# Altium PCB MCU_FOR_DOWNLOAD_V6_8_ROW_PCS.PcbDoc (part 3 of 4)
Units mil, origin at the board's own origin, x right, y up, seen from the top; angles counter-clockwise.
Board outline 2364.06 x 7042.09 mil, 4 copper layers (Top, GND1, GND2, Bottom), stack 35.4 mil thick; 280 components, 38 nets, 1144 pads, 944 vias.
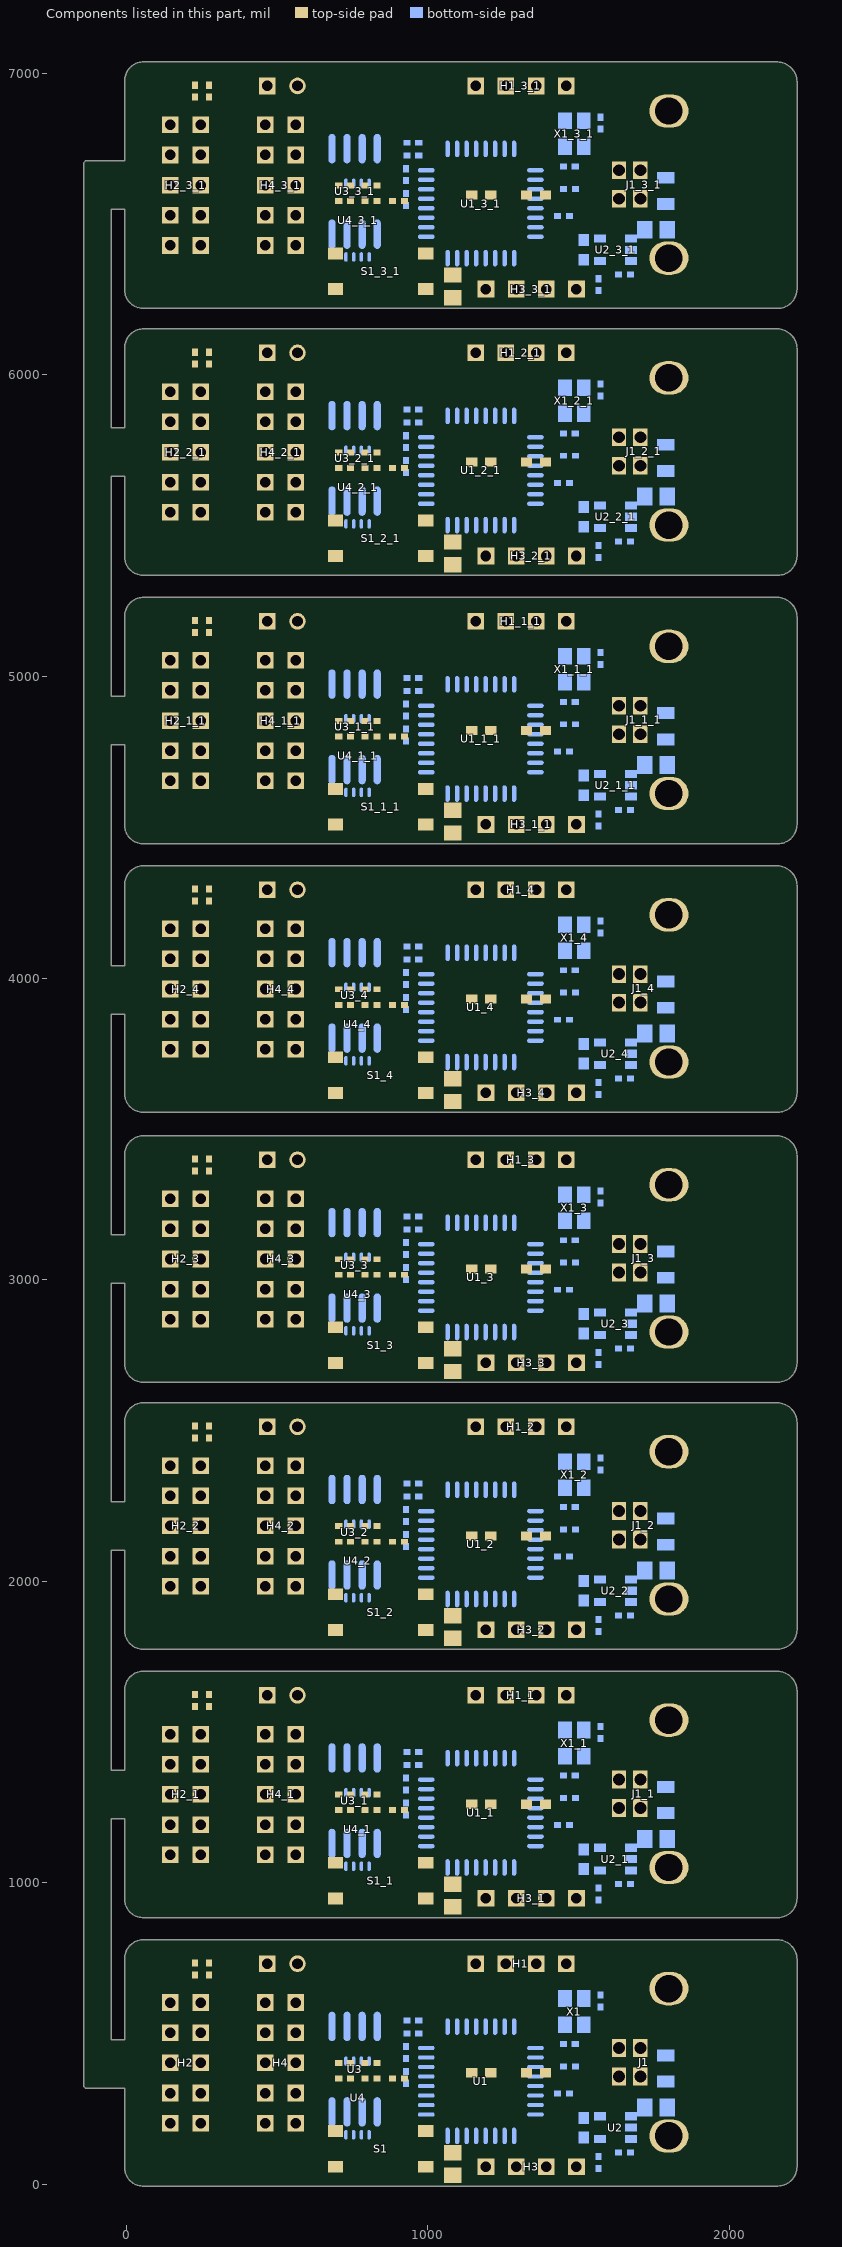
[diagram p3: the components of this part, seen from the top]

## Via types
v1: diameter 16/16/16/16 (per signal layer), hole 8, Top to Bottom, 936 vias
v2: diameter 55/55/55/55 (per signal layer), hole 37, Top to Bottom, 8 vias

## Nets (pads, with @x,y where several pads share a name; then routed paths per layer and width w, separated by ;. In a path a pad name is that pad's centre, name@x,y a point inside that pad or via, vN(x,y) a via of type N, cw(c..) or ccw(c..) an arc to the next point about the centre after c; other vN are vias at no path point) (continued)
copper on no net: (continued)
  Bottom w7.87: 146.85,1393.54 194.88,1441.57 413.78,1441.57 461.81,1393.54 508.27,1440 509.06,1440 509.84,1440.79 582.68,1440.79 601.57,1459.69 601.57,1497.09 637.4,1532.91 878.74,1532.91 966.14,1445.51 966.14,1434.09 966.14,1432.91 968.9,1432.91 970.08,1434.09 970.08,1391.58 970.08,1389.61 928.35,1347.87 ; 146.85,2283.54 194.88,2331.57 413.78,2331.57 461.81,2283.54 508.27,2330 509.06,2330 509.84,2330.79 582.68,2330.79 601.57,2349.69 601.57,2387.09 637.4,2422.91 878.74,2422.91 966.14,2335.51 966.14,2324.09 966.14,2322.91 968.9,2322.91 970.08,2324.09 970.08,2281.58 970.08,2279.61 928.35,2237.87 ; 146.85,3168.54 194.88,3216.57 413.78,3216.57 461.81,3168.54 508.27,3215 509.06,3215 509.84,3215.79 582.68,3215.79 601.57,3234.69 601.57,3272.09 637.4,3307.91 878.74,3307.91 966.14,3220.51 966.14,3209.09 966.14,3207.91 968.9,3207.91 970.08,3209.09 970.08,3166.58 970.08,3164.61 928.35,3122.87 ; 146.85,4063.54 194.88,4111.57 413.78,4111.57 461.81,4063.54 508.27,4110 509.06,4110 509.84,4110.79 582.68,4110.79 601.57,4129.69 601.57,4167.09 637.4,4202.91 878.74,4202.91 966.14,4115.51 966.14,4104.09 966.14,4102.91 968.9,4102.91 970.08,4104.09 970.08,4061.58 970.08,4059.61 928.35,4017.87 ; 146.85,4953.54 194.88,5001.57 413.78,5001.57 461.81,4953.54 508.27,5000 509.06,5000 509.84,5000.79 582.68,5000.79 601.57,5019.69 601.57,5057.09 637.4,5092.91 878.74,5092.91 966.14,5005.51 966.14,4994.09 966.14,4992.91 968.9,4992.91 970.08,4994.09 970.08,4951.58 970.08,4949.61 928.35,4907.87 ; 146.85,5843.54 194.88,5891.57 413.78,5891.57 461.81,5843.54 508.27,5890 509.06,5890 509.84,5890.79 582.68,5890.79 601.57,5909.69 601.57,5947.09 637.4,5982.91 878.74,5982.91 966.14,5895.51 966.14,5884.09 966.14,5882.91 968.9,5882.91 970.08,5884.09 970.08,5841.58 970.08,5839.61 928.35,5797.87 ; 146.85,6728.54 194.88,6776.57 413.78,6776.57 461.81,6728.54 508.27,6775 509.06,6775 509.84,6775.79 582.68,6775.79 601.57,6794.69 601.57,6832.09 637.4,6867.91 878.74,6867.91 966.14,6780.51 966.14,6769.09 966.14,6767.91 968.9,6767.91 970.08,6769.09 970.08,6726.58 970.08,6724.61 928.35,6682.87 ; 461.81,1193.54 511.42,1243.15 511.42,1243.94 598.82,1243.94 638.58,1283.7 638.58,1432.91 638.98,1433.31 638.98,1470.31 661.02,1492.36 753.9,1492.36 785.12,1461.14 785.12,1417.05 782.48,1414.41 782.48,1321.1 v1@782.48,1320.31 ; 461.81,2083.54 511.42,2133.15 511.42,2133.94 598.82,2133.94 638.58,2173.7 638.58,2322.91 638.98,2323.31 638.98,2360.31 661.02,2382.36 753.9,2382.36 785.12,2351.14 785.12,2307.05 782.48,2304.41 782.48,2211.1 v1@782.48,2210.31 ; 461.81,2968.54 511.42,3018.15 511.42,3018.94 598.82,3018.94 638.58,3058.7 638.58,3207.91 638.98,3208.31 638.98,3245.31 661.02,3267.36 753.9,3267.36 785.12,3236.14 785.12,3192.05 782.48,3189.41 782.48,3096.1 v1@782.48,3095.31 ; 461.81,3863.54 511.42,3913.15 511.42,3913.94 598.82,3913.94 638.58,3953.7 638.58,4102.91 638.98,4103.31 638.98,4140.31 661.02,4162.36 753.9,4162.36 785.12,4131.14 785.12,4087.05 782.48,4084.41 782.48,3991.1 v1@782.48,3990.31 ; 461.81,4753.54 511.42,4803.15 511.42,4803.94 598.82,4803.94 638.58,4843.7 638.58,4992.91 638.98,4993.31 638.98,5030.31 661.02,5052.36 753.9,5052.36 785.12,5021.14 785.12,4977.05 782.48,4974.41 782.48,4881.1 v1@782.48,4880.31 ; 461.81,5643.54 511.42,5693.15 511.42,5693.94 598.82,5693.94 638.58,5733.7 638.58,5882.91 638.98,5883.31 638.98,5920.31 661.02,5942.36 753.9,5942.36 785.12,5911.14 785.12,5867.05 782.48,5864.41 782.48,5771.1 v1@782.48,5770.31 ; 461.81,6528.54 511.42,6578.15 511.42,6578.94 598.82,6578.94 638.58,6618.7 638.58,6767.91 638.98,6768.31 638.98,6805.31 661.02,6827.36 753.9,6827.36 785.12,6796.14 785.12,6752.05 782.48,6749.41 782.48,6656.1 v1@782.48,6655.31 ; 463.55,1096.92 464.09,1096.92 465.75,1098.58 466.54,1098.58 507.56,1139.61 587.8,1139.61 728.74,1280.55 728.74,1299.45 728.74,1323.86 692.52,1360.08 v1@692.13,1360.47 ; 463.55,1986.92 464.09,1986.92 465.75,1988.58 466.54,1988.58 507.56,2029.61 587.8,2029.61 728.74,2170.55 728.74,2189.45 728.74,2213.86 692.52,2250.08 v1@692.13,2250.47 ; 463.55,2871.92 464.09,2871.92 465.75,2873.58 466.54,2873.58 507.56,2914.61 587.8,2914.61 728.74,3055.55 728.74,3074.45 728.74,3098.86 692.52,3135.08 v1@692.13,3135.47 ; 463.55,3766.92 464.09,3766.92 465.75,3768.58 466.54,3768.58 507.56,3809.61 587.8,3809.61 728.74,3950.55 728.74,3969.45 728.74,3993.86 692.52,4030.08 v1@692.13,4030.47 ; 463.55,4656.92 464.09,4656.92 465.75,4658.58 466.54,4658.58 507.56,4699.61 587.8,4699.61 728.74,4840.55 728.74,4859.45 728.74,4883.86 692.52,4920.08 v1@692.13,4920.47 ; 463.55,5546.92 464.09,5546.92 465.75,5548.58 466.54,5548.58 507.56,5589.61 587.8,5589.61 728.74,5730.55 728.74,5749.45 728.74,5773.86 692.52,5810.08 v1@692.13,5810.47 ; 463.55,6431.92 464.09,6431.92 465.75,6433.58 466.54,6433.58 507.56,6474.61 587.8,6474.61 728.74,6615.55 728.74,6634.45 728.74,6658.86 692.52,6695.08 v1@692.13,6695.47 ; 561.81,1193.54 575.2,1193.54 575.98,1192.76 658.27,1275.04 658.27,1461.26 673.23,1476.22 715.94,1476.22 732.48,1459.69 732.48,1414.41 733.86,1413.03 733.86,1370.71 754.33,1350.24 754.33,1321.1 v1(753.94,1321.1) 754.33,1320.71 754.33,1299.45 ; 561.81,1493.54 618.11,1549.84 929.53,1549.84 1044.49,1434.88 1044.49,1171.5 1026.77,1153.78 994.88,1153.78 994.09,1154.57 962.6,1154.57 835.83,1027.8 766.54,1027.8 754.33,1040 754.33,1055.35 754.33,1077.8 733.07,1099.06 733.07,1130.35 732.48,1130.94 ; 561.81,2083.54 575.2,2083.54 575.98,2082.76 658.27,2165.04 658.27,2351.26 673.23,2366.22 715.94,2366.22 732.48,2349.69 732.48,2304.41 733.86,2303.03 733.86,2260.71 754.33,2240.24 754.33,2211.1 v1(753.94,2211.1) 754.33,2210.71 754.33,2189.45 ; 561.81,2383.54 618.11,2439.84 929.53,2439.84 1044.49,2324.88 1044.49,2061.5 1026.77,2043.78 994.88,2043.78 994.09,2044.57 962.6,2044.57 835.83,1917.8 766.54,1917.8 754.33,1930 754.33,1945.35 754.33,1967.8 733.07,1989.06 733.07,2020.35 732.48,2020.94 ; 561.81,2968.54 575.2,2968.54 575.98,2967.76 658.27,3050.04 658.27,3236.26 673.23,3251.22 715.94,3251.22 732.48,3234.69 732.48,3189.41 733.86,3188.03 733.86,3145.71 754.33,3125.24 754.33,3096.1 v1(753.94,3096.1) 754.33,3095.71 754.33,3074.45 ; 561.81,3268.54 618.11,3324.84 929.53,3324.84 1044.49,3209.88 1044.49,2946.5 1026.77,2928.78 994.88,2928.78 994.09,2929.57 962.6,2929.57 835.83,2802.8 766.54,2802.8 754.33,2815 754.33,2830.35 754.33,2852.8 733.07,2874.06 733.07,2905.35 732.48,2905.94 ; 561.81,3863.54 575.2,3863.54 575.98,3862.76 658.27,3945.04 658.27,4131.26 673.23,4146.22 715.94,4146.22 732.48,4129.69 732.48,4084.41 733.86,4083.03 733.86,4040.71 754.33,4020.24 754.33,3991.1 v1(753.94,3991.1) 754.33,3990.71 754.33,3969.45 ; 561.81,4163.54 618.11,4219.84 929.53,4219.84 1044.49,4104.88 1044.49,3841.5 1026.77,3823.78 994.88,3823.78 994.09,3824.57 962.6,3824.57 835.83,3697.8 766.54,3697.8 754.33,3710 754.33,3725.35 754.33,3747.8 733.07,3769.06 733.07,3800.35 732.48,3800.94 ; 561.81,4753.54 575.2,4753.54 575.98,4752.76 658.27,4835.04 658.27,5021.26 673.23,5036.22 715.94,5036.22 732.48,5019.69 732.48,4974.41 733.86,4973.03 733.86,4930.71 754.33,4910.24 754.33,4881.1 v1(753.94,4881.1) 754.33,4880.71 754.33,4859.45 ; 561.81,5053.54 618.11,5109.84 929.53,5109.84 1044.49,4994.88 1044.49,4731.5 1026.77,4713.78 994.88,4713.78 994.09,4714.57 962.6,4714.57 835.83,4587.8 766.54,4587.8 754.33,4600 754.33,4615.35 754.33,4637.8 733.07,4659.06 733.07,4690.35 732.48,4690.94 ; 561.81,5643.54 575.2,5643.54 575.98,5642.76 658.27,5725.04 658.27,5911.26 673.23,5926.22 715.94,5926.22 732.48,5909.69 732.48,5864.41 733.86,5863.03 733.86,5820.71 754.33,5800.24 754.33,5771.1 v1(753.94,5771.1) 754.33,5770.71 754.33,5749.45 ; 561.81,5943.54 618.11,5999.84 929.53,5999.84 1044.49,5884.88 1044.49,5621.5 1026.77,5603.78 994.88,5603.78 994.09,5604.57 962.6,5604.57 835.83,5477.8 766.54,5477.8 754.33,5490 754.33,5505.35 754.33,5527.8 733.07,5549.06 733.07,5580.35 732.48,5580.94 ; 561.81,6528.54 575.2,6528.54 575.98,6527.76 658.27,6610.04 658.27,6796.26 673.23,6811.22 715.94,6811.22 732.48,6794.69 732.48,6749.41 733.86,6748.03 733.86,6705.71 754.33,6685.24 754.33,6656.1 v1(753.94,6656.1) 754.33,6655.71 754.33,6634.45 ; 561.81,6828.54 618.11,6884.84 929.53,6884.84 1044.49,6769.88 1044.49,6506.5 1026.77,6488.78 994.88,6488.78 994.09,6489.57 962.6,6489.57 835.83,6362.8 766.54,6362.8 754.33,6375 754.33,6390.35 754.33,6412.8 733.07,6434.06 733.07,6465.35 732.48,6465.94 ; 565.4,1100.1 569.82,1100.1 570.87,1099.06 677.97,1206.16 782.48,1206.16 782.48,1203.78 ; 565.4,1990.1 569.82,1990.1 570.87,1989.06 677.97,2096.16 782.48,2096.16 782.48,2093.78 ; 565.4,2875.1 569.82,2875.1 570.87,2874.06 677.97,2981.16 782.48,2981.16 782.48,2978.78 ; 565.4,3770.1 569.82,3770.1 570.87,3769.06 677.97,3876.16 782.48,3876.16 782.48,3873.78 ; 565.4,4660.1 569.82,4660.1 570.87,4659.06 677.97,4766.16 782.48,4766.16 782.48,4763.78 ; 565.4,5550.1 569.82,5550.1 570.87,5549.06 677.97,5656.16 782.48,5656.16 782.48,5653.78 ; 565.4,6435.1 569.82,6435.1 570.87,6434.06 677.97,6541.16 782.48,6541.16 782.48,6538.78 ; 682.48,1414.41 683.46,1413.43 683.46,1369.13 v1@692.13,1360.47 ; 682.48,2304.41 683.46,2303.43 683.46,2259.13 v1@692.13,2250.47 ; 682.48,3189.41 683.46,3188.43 683.46,3144.13 v1@692.13,3135.47 ; 682.48,4084.41 683.46,4083.43 683.46,4039.13 v1@692.13,4030.47 ; 682.48,4974.41 683.46,4973.43 683.46,4929.13 v1@692.13,4920.47 ; 682.48,5864.41 683.46,5863.43 683.46,5819.13 v1@692.13,5810.47 ; 682.48,6749.41 683.46,6748.43 683.46,6704.13 v1@692.13,6695.47 ; v1(692.91,1187.24) 692.91,1186.65 682.48,1176.22 ; v1(692.91,1360.47) v1@692.13,1360.47 ; v1(692.91,2077.24) 692.91,2076.65 682.48,2066.22 ; v1(692.91,2250.47) v1@692.13,2250.47 ; v1(692.91,2962.24) 692.91,2961.65 682.48,2951.22 ; v1(692.91,3135.47) v1@692.13,3135.47 ; v1(692.91,3857.24) 692.91,3856.65 682.48,3846.22 ; v1(692.91,4030.47) v1@692.13,4030.47 ; v1(692.91,4747.24) 692.91,4746.65 682.48,4736.22 ; v1(692.91,4920.47) v1@692.13,4920.47 ; v1(692.91,5637.24) 692.91,5636.65 682.48,5626.22 ; v1(692.91,5810.47) v1@692.13,5810.47 ; v1(692.91,6522.24) 692.91,6521.65 682.48,6511.22 ; v1(692.91,6695.47) v1@692.13,6695.47 ; 779.92,1055.35 779.92,1109.69 782.48,1112.24 782.48,1130.94 782.48,1203.78 ; 779.92,1299.45 782.48,1302.01 v1@782.48,1320.31 ; 779.92,1945.35 779.92,1999.69 782.48,2002.24 782.48,2020.94 782.48,2093.78 ; 779.92,2189.45 782.48,2192.01 v1@782.48,2210.31 ; 779.92,2830.35 779.92,2884.69 782.48,2887.24 782.48,2905.94 782.48,2978.78 ; 779.92,3074.45 782.48,3077.01 v1@782.48,3095.31 ; 779.92,3725.35 779.92,3779.69 782.48,3782.24 782.48,3800.94 782.48,3873.78 ; 779.92,3969.45 782.48,3972.01 v1@782.48,3990.31 ; 779.92,4615.35 779.92,4669.69 782.48,4672.24 782.48,4690.94 782.48,4763.78 ; 779.92,4859.45 782.48,4862.01 v1@782.48,4880.31 ; 779.92,5505.35 779.92,5559.69 782.48,5562.24 782.48,5580.94 782.48,5653.78 ; 779.92,5749.45 782.48,5752.01 v1@782.48,5770.31 ; 779.92,6390.35 779.92,6444.69 782.48,6447.24 782.48,6465.94 782.48,6538.78 ; 779.92,6634.45 782.48,6637.01 v1@782.48,6655.31 ; v1(783.46,1321.1) 782.68,1320.31 v1@782.48,1320.31 ; v1(783.46,2211.1) 782.68,2210.31 v1@782.48,2210.31 ; v1(783.46,3096.1) 782.68,3095.31 v1@782.48,3095.31 ; v1(783.46,3991.1) 782.68,3990.31 v1@782.48,3990.31 ; v1(783.46,4881.1) 782.68,4880.31 v1@782.48,4880.31 ; v1(783.46,5771.1) 782.68,5770.31 v1@782.48,5770.31 ; v1(783.46,6656.1) 782.68,6655.31 v1@782.48,6655.31 ; v1(791.34,1210.87) 784.25,1203.78 782.48,1203.78 ; v1(791.34,2100.87) 784.25,2093.78 782.48,2093.78 ; v1(791.34,2985.87) 784.25,2978.78 782.48,2978.78 ; v1(791.34,3880.87) 784.25,3873.78 782.48,3873.78 ; v1(791.34,4770.87) 784.25,4763.78 782.48,4763.78 ; v1(791.34,5660.87) 784.25,5653.78 782.48,5653.78 ; v1(791.34,6545.87) 784.25,6538.78 782.48,6538.78 ; 805.51,1055.35 805.51,1082.13 832.48,1109.09 832.48,1130.94 833.07,1131.54 833.07,1162.05 816.93,1178.19 816.93,1247.09 839.76,1269.92 v1(893.7,1269.92) 893.7,1360.47 v1(872.05,1382.13) ; 805.51,1945.35 805.51,1972.13 832.48,1999.09 832.48,2020.94 833.07,2021.54 833.07,2052.05 816.93,2068.19 816.93,2137.09 839.76,2159.92 v1(893.7,2159.92) 893.7,2250.47 v1(872.05,2272.13) ; 805.51,2830.35 805.51,2857.13 832.48,2884.09 832.48,2905.94 833.07,2906.54 833.07,2937.05 816.93,2953.19 816.93,3022.09 839.76,3044.92 v1(893.7,3044.92) 893.7,3135.47 v1(872.05,3157.13) ; 805.51,3725.35 805.51,3752.13 832.48,3779.09 832.48,3800.94 833.07,3801.54 833.07,3832.05 816.93,3848.19 816.93,3917.09 839.76,3939.92 v1(893.7,3939.92) 893.7,4030.47 v1(872.05,4052.13) ; 805.51,4615.35 805.51,4642.13 832.48,4669.09 832.48,4690.94 833.07,4691.54 833.07,4722.05 816.93,4738.19 816.93,4807.09 839.76,4829.92 v1(893.7,4829.92) 893.7,4920.47 v1(872.05,4942.13) ; 805.51,5505.35 805.51,5532.13 832.48,5559.09 832.48,5580.94 833.07,5581.54 833.07,5612.05 816.93,5628.19 816.93,5697.09 839.76,5719.92 v1(893.7,5719.92) 893.7,5810.47 v1(872.05,5832.13) ; 805.51,6390.35 805.51,6417.13 832.48,6444.09 832.48,6465.94 833.07,6466.54 833.07,6497.05 816.93,6513.19 816.93,6582.09 839.76,6604.92 v1(893.7,6604.92) 893.7,6695.47 v1(872.05,6717.13) ; v1(844.49,1224.65) 845.28,1224.65 884.65,1185.28 994.88,1185.28 ; v1(844.49,2114.65) 845.28,2114.65 884.65,2075.28 994.88,2075.28 ; v1(844.49,2999.65) 845.28,2999.65 884.65,2960.28 994.88,2960.28 ; v1(844.49,3894.65) 845.28,3894.65 884.65,3855.28 994.88,3855.28 ; v1(844.49,4784.65) 845.28,4784.65 884.65,4745.28 994.88,4745.28 ; v1(844.49,5674.65) 845.28,5674.65 884.65,5635.28 994.88,5635.28 ; v1(844.49,6559.65) 845.28,6559.65 884.65,6520.28 994.88,6520.28 ; 852.76,1414.41 853.94,1415.59 ; 852.76,2304.41 853.94,2305.59 ; 852.76,3189.41 853.94,3190.59 ; 852.76,4084.41 853.94,4085.59 ; 852.76,4974.41 853.94,4975.59 ; 852.76,5864.41 853.94,5865.59 ; 852.76,6749.41 853.94,6750.59 ; v1(910.63,1391.57) 911.02,1391.57 930.71,1391.57 ; v1(910.63,2281.57) 911.02,2281.57 930.71,2281.57 ; v1(910.63,3166.57) 911.02,3166.57 930.71,3166.57 ; v1(910.63,4061.57) 911.02,4061.57 930.71,4061.57 ; v1(910.63,4951.57) 911.02,4951.57 930.71,4951.57 ; v1(910.63,5841.57) 911.02,5841.57 930.71,5841.57 ; v1(910.63,6726.57) 911.02,6726.57 930.71,6726.57 ; 928.35,1225.83 948.82,1225.83 970.47,1247.48 994.09,1247.48 994.88,1248.27 ; 928.35,1265.2 948.03,1265.2 v1(948.82,1265.98) ; 928.35,1308.5 929.92,1308.5 964.17,1342.76 994.88,1342.76 ; 928.35,2115.83 948.82,2115.83 970.47,2137.48 994.09,2137.48 994.88,2138.27 ; 928.35,2155.2 948.03,2155.2 v1(948.82,2155.98) ; 928.35,2198.5 929.92,2198.5 964.17,2232.76 994.88,2232.76 ; 928.35,3000.83 948.82,3000.83 970.47,3022.48 994.09,3022.48 994.88,3023.27 ; 928.35,3040.2 948.03,3040.2 v1(948.82,3040.98) ; 928.35,3083.5 929.92,3083.5 964.17,3117.76 994.88,3117.76 ; 928.35,3895.83 948.82,3895.83 970.47,3917.48 994.09,3917.48 994.88,3918.27 ; 928.35,3935.2 948.03,3935.2 v1(948.82,3935.98) ; 928.35,3978.5 929.92,3978.5 964.17,4012.76 994.88,4012.76 ; 928.35,4785.83 948.82,4785.83 970.47,4807.48 994.09,4807.48 994.88,4808.27 ; 928.35,4825.2 948.03,4825.2 v1(948.82,4825.98) ; 928.35,4868.5 929.92,4868.5 964.17,4902.76 994.88,4902.76 ; 928.35,5675.83 948.82,5675.83 970.47,5697.48 994.09,5697.48 994.88,5698.27 ; 928.35,5715.2 948.03,5715.2 v1(948.82,5715.98) ; 928.35,5758.5 929.92,5758.5 964.17,5792.76 994.88,5792.76 ; 928.35,6560.83 948.82,6560.83 970.47,6582.48 994.09,6582.48 994.88,6583.27 ; 928.35,6600.2 948.03,6600.2 v1(948.82,6600.98) ; 928.35,6643.5 929.92,6643.5 964.17,6677.76 994.88,6677.76 ; v1(944.88,1037.64) 972.05,1037.64 1011.02,1076.61 1011.02,1083.7 ; v1(944.88,1069.13) 945.28,1069.53 945.28,1104.17 963.39,1122.28 994.88,1122.28 ; v1(944.88,1927.64) 972.05,1927.64 1011.02,1966.61 1011.02,1973.7 ; v1(944.88,1959.13) 945.28,1959.53 945.28,1994.17 963.39,2012.28 994.88,2012.28 ; v1(944.88,2812.64) 972.05,2812.64 1011.02,2851.61 1011.02,2858.7 ; v1(944.88,2844.13) 945.28,2844.53 945.28,2879.17 963.39,2897.28 994.88,2897.28 ; v1(944.88,3707.64) 972.05,3707.64 1011.02,3746.61 1011.02,3753.7 ; v1(944.88,3739.13) 945.28,3739.53 945.28,3774.17 963.39,3792.28 994.88,3792.28 ; v1(944.88,4597.64) 972.05,4597.64 1011.02,4636.61 1011.02,4643.7 ; v1(944.88,4629.13) 945.28,4629.53 945.28,4664.17 963.39,4682.28 994.88,4682.28 ; v1(944.88,5487.64) 972.05,5487.64 1011.02,5526.61 1011.02,5533.7 ; v1(944.88,5519.13) 945.28,5519.53 945.28,5554.17 963.39,5572.28 994.88,5572.28 ; v1(944.88,6372.64) 972.05,6372.64 1011.02,6411.61 1011.02,6418.7 ; v1(944.88,6404.13) 945.28,6404.53 945.28,6439.17 963.39,6457.28 994.88,6457.28 ; 1065.75,1051.42 1065.75,1075.83 v1(1074.41,1084.49) ; 1065.75,1413.62 1065.75,1449.45 1159.06,1542.76 1159.06,1622.28 ; 1065.75,1941.42 1065.75,1965.83 v1(1074.41,1974.49) ; 1065.75,2303.62 1065.75,2339.45 1159.06,2432.76 1159.06,2512.28 ; 1065.75,2826.42 1065.75,2850.83 v1(1074.41,2859.49) ; 1065.75,3188.62 1065.75,3224.45 1159.06,3317.76 1159.06,3397.28 ; 1065.75,3721.42 1065.75,3745.83 v1(1074.41,3754.49) ; 1065.75,4083.62 1065.75,4119.45 1159.06,4212.76 1159.06,4292.28 ; 1065.75,4611.42 1065.75,4635.83 v1(1074.41,4644.49) ; 1065.75,4973.62 1065.75,5009.45 1159.06,5102.76 1159.06,5182.28 ; 1065.75,5501.42 1065.75,5525.83 v1(1074.41,5534.49) ; 1065.75,5863.62 1065.75,5899.45 1159.06,5992.76 1159.06,6072.28 ; 1065.75,6386.42 1065.75,6410.83 v1(1074.41,6419.49) ; 1065.75,6748.62 1065.75,6784.45 1159.06,6877.76 1159.06,6957.28 ; v1(1074.8,1228.58) 1075.2,1228.19 1075.2,1147.87 ; v1(1074.8,2118.58) 1075.2,2118.19 1075.2,2037.87 ; v1(1074.8,3003.58) 1075.2,3003.19 1075.2,2922.87 ; v1(1074.8,3898.58) 1075.2,3898.19 1075.2,3817.87 ; v1(1074.8,4788.58) 1075.2,4788.19 1075.2,4707.87 ; v1(1074.8,5678.58) 1075.2,5678.19 1075.2,5597.87 ; v1(1074.8,6563.58) 1075.2,6563.19 1075.2,6482.87 ; v1(1096.46,1092.76) 1097.24,1091.97 1097.24,1051.42 ; v1(1096.46,1982.76) 1097.24,1981.97 1097.24,1941.42 ; v1(1096.46,2867.76) 1097.24,2866.97 1097.24,2826.42 ; v1(1096.46,3762.76) 1097.24,3761.97 1097.24,3721.42 ; v1(1096.46,4652.76) 1097.24,4651.97 1097.24,4611.42 ; v1(1096.46,5542.76) 1097.24,5541.97 1097.24,5501.42 ; v1(1096.46,6427.76) 1097.24,6426.97 1097.24,6386.42 ; 1097.24,1413.62 1097.24,1447.09 1259.06,1608.9 1259.06,1622.28 ; 1097.24,2303.62 1097.24,2337.09 1259.06,2498.9 1259.06,2512.28 ; 1097.24,3188.62 1097.24,3222.09 1259.06,3383.9 1259.06,3397.28 ; 1097.24,4083.62 1097.24,4117.09 1259.06,4278.9 1259.06,4292.28 ; 1097.24,4973.62 1097.24,5007.09 1259.06,5168.9 1259.06,5182.28 ; 1097.24,5863.62 1097.24,5897.09 1259.06,6058.9 1259.06,6072.28 ; 1097.24,6748.62 1097.24,6782.09 1259.06,6943.9 1259.06,6957.28 ; v1(1127.95,1094.72) 1128.74,1093.94 1128.74,1051.42 ; v1(1127.95,1984.72) 1128.74,1983.94 1128.74,1941.42 ; v1(1127.95,2869.72) 1128.74,2868.94 1128.74,2826.42 ; v1(1127.95,3764.72) 1128.74,3763.94 1128.74,3721.42 ; v1(1127.95,4654.72) 1128.74,4653.94 1128.74,4611.42 ; v1(1127.95,5544.72) 1128.74,5543.94 1128.74,5501.42 ; v1(1127.95,6429.72) 1128.74,6428.94 1128.74,6386.42 ; 1128.74,1413.62 1128.74,1447.48 1240.16,1558.9 1307.09,1558.9 1359.06,1610.87 1359.06,1622.28 ; 1128.74,2303.62 1128.74,2337.48 1240.16,2448.9 1307.09,2448.9 1359.06,2500.87 1359.06,2512.28 ; 1128.74,3188.62 1128.74,3222.48 1240.16,3333.9 1307.09,3333.9 1359.06,3385.87 1359.06,3397.28 ; 1128.74,4083.62 1128.74,4117.48 1240.16,4228.9 1307.09,4228.9 1359.06,4280.87 1359.06,4292.28 ; 1128.74,4973.62 1128.74,5007.48 1240.16,5118.9 1307.09,5118.9 1359.06,5170.87 1359.06,5182.28 ; 1128.74,5863.62 1128.74,5897.48 1240.16,6008.9 1307.09,6008.9 1359.06,6060.87 1359.06,6072.28 ; 1128.74,6748.62 1128.74,6782.48 1240.16,6893.9 1307.09,6893.9 1359.06,6945.87 1359.06,6957.28 ; v1(1149.61,1360.47) 1208.27,1360.47 1208.66,1360.08 1223.23,1374.65 1223.23,1413.62 ; v1(1149.61,2250.47) 1208.27,2250.47 1208.66,2250.08 1223.23,2264.65 1223.23,2303.62 ; v1(1149.61,3135.47) 1208.27,3135.47 1208.66,3135.08 1223.23,3149.65 1223.23,3188.62 ; v1(1149.61,4030.47) 1208.27,4030.47 1208.66,4030.08 1223.23,4044.65 1223.23,4083.62 ; v1(1149.61,4920.47) 1208.27,4920.47 1208.66,4920.08 1223.23,4934.65 1223.23,4973.62 ; v1(1149.61,5810.47) 1208.27,5810.47 1208.66,5810.08 1223.23,5824.65 1223.23,5863.62 ; v1(1149.61,6695.47) 1208.27,6695.47 1208.66,6695.08 1223.23,6709.65 1223.23,6748.62 ; v1(1159.45,1090.79) 1160.24,1090 1160.24,1051.42 ; v1(1159.45,1980.79) 1160.24,1980 1160.24,1941.42 ; v1(1159.45,2865.79) 1160.24,2865 1160.24,2826.42 ; v1(1159.45,3760.79) 1160.24,3760 1160.24,3721.42 ; v1(1159.45,4650.79) 1160.24,4650 1160.24,4611.42 ; v1(1159.45,5540.79) 1160.24,5540 1160.24,5501.42 ; v1(1159.45,6425.79) 1160.24,6425 1160.24,6386.42 ; 1160.24,1413.62 1160.24,1443.54 1254.33,1537.64 1377.56,1537.64 1450.79,1610.87 1459.06,1610.87 1459.45,1610.87 1459.45,1614.02 1459.06,1622.28 ; 1160.24,2303.62 1160.24,2333.54 1254.33,2427.64 1377.56,2427.64 1450.79,2500.87 1459.06,2500.87 1459.45,2500.87 1459.45,2504.02 1459.06,2512.28 ; 1160.24,3188.62 1160.24,3218.54 1254.33,3312.64 1377.56,3312.64 1450.79,3385.87 1459.06,3385.87 1459.45,3385.87 1459.45,3389.02 1459.06,3397.28 ; 1160.24,4083.62 1160.24,4113.54 1254.33,4207.64 1377.56,4207.64 1450.79,4280.87 1459.06,4280.87 1459.45,4280.87 1459.45,4284.02 1459.06,4292.28 ; 1160.24,4973.62 1160.24,5003.54 1254.33,5097.64 1377.56,5097.64 1450.79,5170.87 1459.06,5170.87 1459.45,5170.87 1459.45,5174.02 1459.06,5182.28 ; 1160.24,5863.62 1160.24,5893.54 1254.33,5987.64 1377.56,5987.64 1450.79,6060.87 1459.06,6060.87 1459.45,6060.87 1459.45,6064.02 1459.06,6072.28 ; 1160.24,6748.62 1160.24,6778.54 1254.33,6872.64 1377.56,6872.64 1450.79,6945.87 1459.06,6945.87 1459.45,6945.87 1459.45,6949.02 1459.06,6957.28 ; 1191.73,1051.42 1191.73,1091.18 1222.44,1121.89 v1(1222.44,1122.28) ; v1(1191.73,1378.98) 1191.73,1413.62 ; 1191.73,1941.42 1191.73,1981.18 1222.44,2011.89 v1(1222.44,2012.28) ; v1(1191.73,2268.98) 1191.73,2303.62 ; 1191.73,2826.42 1191.73,2866.18 1222.44,2896.89 v1(1222.44,2897.28) ; v1(1191.73,3153.98) 1191.73,3188.62 ; 1191.73,3721.42 1191.73,3761.18 1222.44,3791.89 v1(1222.44,3792.28) ; v1(1191.73,4048.98) 1191.73,4083.62 ; 1191.73,4611.42 1191.73,4651.18 1222.44,4681.89 v1(1222.44,4682.28) ; v1(1191.73,4938.98) 1191.73,4973.62 ; 1191.73,5501.42 1191.73,5541.18 1222.44,5571.89 v1(1222.44,5572.28) ; v1(1191.73,5828.98) 1191.73,5863.62 ; 1191.73,6386.42 1191.73,6426.18 1222.44,6456.89 v1(1222.44,6457.28) ; v1(1191.73,6713.98) 1191.73,6748.62 ; v1(1222.44,1088.82) 1223.23,1088.03 1223.23,1051.42 ; v1(1222.44,1978.82) 1223.23,1978.03 1223.23,1941.42 ; v1(1222.44,2863.82) 1223.23,2863.03 1223.23,2826.42 ; v1(1222.44,3758.82) 1223.23,3758.03 1223.23,3721.42 ; v1(1222.44,4648.82) 1223.23,4648.03 1223.23,4611.42 ; v1(1222.44,5538.82) 1223.23,5538.03 1223.23,5501.42 ; v1(1222.44,6423.82) 1223.23,6423.03 1223.23,6386.42 ; 1254.72,1051.42 1254.72,1012.05 1297.01,969.76 1297.01,949.26 1300.59,949.26 1292.91,949.06 ; 1254.72,1413.62 1254.72,1433.7 1281.5,1460.47 1473.62,1460.47 1512.99,1499.84 1512.99,1506.93 1512.99,1507.32 1516.22,1507.32 1516.61,1506.93 1543.31,1480.24 1543.31,1479.37 1572.44,1479.37 ; 1254.72,1941.42 1254.72,1902.05 1297.01,1859.76 1297.01,1839.26 1300.59,1839.26 1292.91,1839.06 ; 1254.72,2303.62 1254.72,2323.7 1281.5,2350.47 1473.62,2350.47 1512.99,2389.84 1512.99,2396.93 1512.99,2397.32 1516.22,2397.32 1516.61,2396.93 1543.31,2370.24 1543.31,2369.37 1572.44,2369.37 ; 1254.72,2826.42 1254.72,2787.05 1297.01,2744.76 1297.01,2724.26 1300.59,2724.26 1292.91,2724.06 ; 1254.72,3188.62 1254.72,3208.7 1281.5,3235.47 1473.62,3235.47 1512.99,3274.84 1512.99,3281.93 1512.99,3282.32 1516.22,3282.32 1516.61,3281.93 1543.31,3255.24 1543.31,3254.37 1572.44,3254.37 ; 1254.72,3721.42 1254.72,3682.05 1297.01,3639.76 1297.01,3619.26 1300.59,3619.26 1292.91,3619.06 ; 1254.72,4083.62 1254.72,4103.7 1281.5,4130.47 1473.62,4130.47 1512.99,4169.84 1512.99,4176.93 1512.99,4177.32 1516.22,4177.32 1516.61,4176.93 1543.31,4150.24 1543.31,4149.37 1572.44,4149.37 ; 1254.72,4611.42 1254.72,4572.05 1297.01,4529.76 1297.01,4509.26 1300.59,4509.26 1292.91,4509.06 ; 1254.72,4973.62 1254.72,4993.7 1281.5,5020.47 1473.62,5020.47 1512.99,5059.84 1512.99,5066.93 1512.99,5067.32 1516.22,5067.32 1516.61,5066.93 1543.31,5040.24 1543.31,5039.37 1572.44,5039.37 ; 1254.72,5501.42 1254.72,5462.05 1297.01,5419.76 1297.01,5399.26 1300.59,5399.26 1292.91,5399.06 ; 1254.72,5863.62 1254.72,5883.7 1281.5,5910.47 1473.62,5910.47 1512.99,5949.84 1512.99,5956.93 1512.99,5957.32 1516.22,5957.32 1516.61,5956.93 1543.31,5930.24 1543.31,5929.37 1572.44,5929.37 ; 1254.72,6386.42 1254.72,6347.05 1297.01,6304.76 1297.01,6284.26 1300.59,6284.26 1292.91,6284.06 ; 1254.72,6748.62 1254.72,6768.7 1281.5,6795.47 1473.62,6795.47 1512.99,6834.84 1512.99,6841.93 1512.99,6842.32 1516.22,6842.32 1516.61,6841.93 1543.31,6815.24 1543.31,6814.37 1572.44,6814.37 ; 1286.22,1051.42 1286.22,1013.62 1306.5,993.35 1359.06,993.35 1398.13,954.27 1400.79,951.61 1392.91,949.06 ; 1286.22,1413.62 1286.22,1434.09 1294.88,1442.76 1438.58,1442.76 1455.04,1426.3 1455.04,1420.31 1455.04,1414.33 1449.61,1408.9 1449.61,1355.75 ; 1286.22,1941.42 1286.22,1903.62 1306.5,1883.35 1359.06,1883.35 1398.13,1844.27 1400.79,1841.61 1392.91,1839.06 ; 1286.22,2303.62 1286.22,2324.09 1294.88,2332.76 1438.58,2332.76 1455.04,2316.3 1455.04,2310.31 1455.04,2304.33 1449.61,2298.9 1449.61,2245.75 ; 1286.22,2826.42 1286.22,2788.62 1306.5,2768.35 1359.06,2768.35 1398.13,2729.27 1400.79,2726.61 1392.91,2724.06 ; 1286.22,3188.62 1286.22,3209.09 1294.88,3217.76 1438.58,3217.76 1455.04,3201.3 1455.04,3195.31 1455.04,3189.33 1449.61,3183.9 1449.61,3130.75 ; 1286.22,3721.42 1286.22,3683.62 1306.5,3663.35 1359.06,3663.35 1398.13,3624.27 1400.79,3621.61 1392.91,3619.06 ; 1286.22,4083.62 1286.22,4104.09 1294.88,4112.76 1438.58,4112.76 1455.04,4096.3 1455.04,4090.31 1455.04,4084.33 1449.61,4078.9 1449.61,4025.75 ; 1286.22,4611.42 1286.22,4573.62 1306.5,4553.35 1359.06,4553.35 1398.13,4514.27 1400.79,4511.61 1392.91,4509.06 ; 1286.22,4973.62 1286.22,4994.09 1294.88,5002.76 1438.58,5002.76 1455.04,4986.3 1455.04,4980.31 1455.04,4974.33 1449.61,4968.9 1449.61,4915.75 ; 1286.22,5501.42 1286.22,5463.62 1306.5,5443.35 1359.06,5443.35 1398.13,5404.27 1400.79,5401.61 1392.91,5399.06 ; 1286.22,5863.62 1286.22,5884.09 1294.88,5892.76 1438.58,5892.76 1455.04,5876.3 1455.04,5870.31 1455.04,5864.33 1449.61,5858.9 1449.61,5805.75 ; 1286.22,6386.42 1286.22,6348.62 1306.5,6328.35 1359.06,6328.35 1398.13,6289.27 1400.79,6286.61 1392.91,6284.06 ; 1286.22,6748.62 1286.22,6769.09 1294.88,6777.76 1438.58,6777.76 1455.04,6761.3 1455.04,6755.31 1455.04,6749.33 1449.61,6743.9 1449.61,6690.75 ; v1(1309.06,1342.76) 1357.09,1342.76 ; v1(1309.06,2232.76) 1357.09,2232.76 ; v1(1309.06,3117.76) 1357.09,3117.76 ; v1(1309.06,4012.76) 1357.09,4012.76 ; v1(1309.06,4902.76) 1357.09,4902.76 ; v1(1309.06,5792.76) 1357.09,5792.76 ; v1(1309.06,6677.76) 1357.09,6677.76 ; v1(1311.02,1311.26) 1357.09,1311.26 ; v1(1311.02,2201.26) 1357.09,2201.26 ; v1(1311.02,3086.26) 1357.09,3086.26 ; v1(1311.02,3981.26) 1357.09,3981.26 ; v1(1311.02,4871.26) 1357.09,4871.26 ; v1(1311.02,5761.26) 1357.09,5761.26 ; v1(1311.02,6646.26) 1357.09,6646.26 ; v1(1322.83,1286.06) 1328.6,1280.3 1328.6,1280.01 1328.85,1279.76 1357.09,1279.76 1381.89,1279.76 v1(1395.67,1293.54) ; v1(1322.83,2176.06) 1328.6,2170.3 1328.6,2170.01 1328.85,2169.76 1357.09,2169.76 1381.89,2169.76 v1(1395.67,2183.54) ; v1(1322.83,3061.06) 1328.6,3055.3 1328.6,3055.01 1328.85,3054.76 1357.09,3054.76 1381.89,3054.76 v1(1395.67,3068.54) ; v1(1322.83,3956.06) 1328.6,3950.3 1328.6,3950.01 1328.85,3949.76 1357.09,3949.76 1381.89,3949.76 v1(1395.67,3963.54) ; v1(1322.83,4846.06) 1328.6,4840.3 1328.6,4840.01 1328.85,4839.76 1357.09,4839.76 1381.89,4839.76 v1(1395.67,4853.54) ; v1(1322.83,5736.06) 1328.6,5730.3 1328.6,5730.01 1328.85,5729.76 1357.09,5729.76 1381.89,5729.76 v1(1395.67,5743.54) ; v1(1322.83,6621.06) 1328.6,6615.3 1328.6,6615.01 1328.85,6614.76 1357.09,6614.76 1381.89,6614.76 v1(1395.67,6628.54) ; v1(1425.2,1281.73) 1450,1281.73 1450.39,1281.34 ; v1(1425.2,2171.73) 1450,2171.73 1450.39,2171.34 ; v1(1425.2,3056.73) 1450,3056.73 1450.39,3056.34 ; v1(1425.2,3951.73) 1450,3951.73 1450.39,3951.34 ; v1(1425.2,4841.73) 1450,4841.73 1450.39,4841.34 ; v1(1425.2,5731.73) 1450,5731.73 1450.39,5731.34 ; v1(1425.2,6616.73) 1450,6616.73 1450.39,6616.34 ; 1469.68,1191.58 1489.76,1191.58 v1(1490.16,1191.18) ; 1469.68,2081.58 1489.76,2081.58 v1(1490.16,2081.18) ; 1469.68,2966.58 1489.76,2966.58 v1(1490.16,2966.18) ; 1469.68,3861.58 1489.76,3861.58 v1(1490.16,3861.18) ; 1469.68,4751.58 1489.76,4751.58 v1(1490.16,4751.18) ; 1469.68,5641.58 1489.76,5641.58 v1(1490.16,5641.18) ; 1469.68,6526.58 1489.76,6526.58 v1(1490.16,6526.18) ; 1632.68,997.09 1619.29,1010.47 1617.72,1010.47 1617.72,1088.57 1646.88,1117.73 1647.02,1117.73 1647.24,1117.95 1673.23,1117.95 1674.02,1117.18 1673.23,1116.38 ; 1632.68,1887.09 1619.29,1900.47 1617.72,1900.47 1617.72,1978.57 1646.88,2007.73 1647.02,2007.73 1647.24,2007.95 1673.23,2007.95 1674.02,2007.18 1673.23,2006.38 ; 1632.68,2772.09 1619.29,2785.47 1617.72,2785.47 1617.72,2863.57 1646.88,2892.73 1647.02,2892.73 1647.24,2892.95 1673.23,2892.95 1674.02,2892.18 1673.23,2891.38 ; 1632.68,3667.09 1619.29,3680.47 1617.72,3680.47 1617.72,3758.57 1646.88,3787.73 1647.02,3787.73 1647.24,3787.95 1673.23,3787.95 1674.02,3787.18 1673.23,3786.38 ; 1632.68,4557.09 1619.29,4570.47 1617.72,4570.47 1617.72,4648.57 1646.88,4677.73 1647.02,4677.73 1647.24,4677.95 1673.23,4677.95 1674.02,4677.18 1673.23,4676.38 ; 1632.68,5447.09 1619.29,5460.47 1617.72,5460.47 1617.72,5538.57 1646.88,5567.73 1647.02,5567.73 1647.24,5567.95 1673.23,5567.95 1674.02,5567.18 1673.23,5566.38 ; 1632.68,6332.09 1619.29,6345.47 1617.72,6345.47 1617.72,6423.57 1646.88,6452.73 1647.02,6452.73 1647.24,6452.95 1673.23,6452.95 1674.02,6452.18 1673.23,6451.38 ; v1(1639.76,1078.98) 1673.23,1078.98 1690.94,1078.98 1691.73,1078.19 ; v1(1639.76,1968.98) 1673.23,1968.98 1690.94,1968.98 1691.73,1968.19 ; v1(1639.76,2853.98) 1673.23,2853.98 1690.94,2853.98 1691.73,2853.19 ; v1(1639.76,3748.98) 1673.23,3748.98 1690.94,3748.98 1691.73,3748.19 ; v1(1639.76,4638.98) 1673.23,4638.98 1690.94,4638.98 1691.73,4638.19 ; v1(1639.76,5528.98) 1673.23,5528.98 1690.94,5528.98 1691.73,5528.19 ; v1(1639.76,6413.98) 1673.23,6413.98 1690.94,6413.98 1691.73,6413.19 ; 1672.05,997.09 1673.23,998.27 1673.23,1041.57 v1(1702.76,1041.57) ; 1672.05,1887.09 1673.23,1888.27 1673.23,1931.57 v1(1702.76,1931.57) ; 1672.05,2772.09 1673.23,2773.27 1673.23,2816.57 v1(1702.76,2816.57) ; 1672.05,3667.09 1673.23,3668.27 1673.23,3711.57 v1(1702.76,3711.57) ; 1672.05,4557.09 1673.23,4558.27 1673.23,4601.57 v1(1702.76,4601.57) ; 1672.05,5447.09 1673.23,5448.27 1673.23,5491.57 v1(1702.76,5491.57) ; 1672.05,6332.09 1673.23,6333.27 1673.23,6376.57 v1(1702.76,6376.57) ; v1(1700.79,1069.13) 1691.73,1078.19 ; v1(1700.79,1959.13) 1691.73,1968.19 ; v1(1700.79,2844.13) 1691.73,2853.19 ; v1(1700.79,3739.13) 1691.73,3748.19 ; v1(1700.79,4629.13) 1691.73,4638.19 ; v1(1700.79,5519.13) 1691.73,5528.19 ; v1(1700.79,6404.13) 1691.73,6413.19 ; v1(1702.76,1088.82) 1692.13,1078.19 1691.73,1078.19 ; v1(1702.76,1978.82) 1692.13,1968.19 1691.73,1968.19 ; v1(1702.76,2863.82) 1692.13,2853.19 1691.73,2853.19 ; v1(1702.76,3758.82) 1692.13,3748.19 1691.73,3748.19 ; v1(1702.76,4648.82) 1692.13,4638.19 1691.73,4638.19 ; v1(1702.76,5538.82) 1692.13,5528.19 1691.73,5528.19 ; v1(1702.76,6423.82) 1692.13,6413.19 1691.73,6413.19 ; 682.48,1176.22 682.48,1130.94 682.48,1128 686.32,1131.84 682.48,1176.22 ; 682.48,2066.22 682.48,2020.94 682.48,2018 686.32,2021.84 682.48,2066.22 ; 682.48,2951.22 682.48,2905.94 682.48,2903 686.32,2906.84 682.48,2951.22 ; 682.48,3846.22 682.48,3800.94 682.48,3798 686.32,3801.84 682.48,3846.22 ; 682.48,4736.22 686.32,4691.84 682.48,4688 682.48,4690.94 682.48,4736.22 ; 682.48,5626.22 686.32,5581.84 682.48,5578 682.48,5580.94 682.48,5626.22 ; 682.48,6511.22 686.32,6466.84 682.48,6463 682.48,6465.94 682.48,6511.22
  Bottom w9.84: 1357.09,1153.78 1376.38,1153.78 ; 1357.09,2043.78 1376.38,2043.78 ; 1357.09,2928.78 1376.38,2928.78 ; 1357.09,3823.78 1376.38,3823.78 ; 1357.09,4713.78 1376.38,4713.78 ; 1357.09,5603.78 1376.38,5603.78 ; 1357.09,6488.78 1376.38,6488.78
  Bottom w11.81: 461.81,1093.54 463.55,1096.92 ; 461.81,1983.54 463.55,1986.92 ; 461.81,2868.54 463.55,2871.92 ; 461.81,3763.54 463.55,3766.92 ; 461.81,4653.54 463.55,4656.92 ; 461.81,5543.54 463.55,5546.92 ; 461.81,6428.54 463.55,6431.92 ; 561.81,1093.54 565.4,1097.13 565.4,1100.1 ; 561.81,1393.54 575.72,1393.54 620.08,1437.9 620.08,1485.28 644.88,1510.08 798.43,1510.08 832.48,1476.02 832.48,1414.41 ; 561.81,1983.54 565.4,1987.13 565.4,1990.1 ; 561.81,2283.54 575.72,2283.54 620.08,2327.9 620.08,2375.28 644.88,2400.08 798.43,2400.08 832.48,2366.02 832.48,2304.41 ; 561.81,2868.54 565.4,2872.13 565.4,2875.1 ; 561.81,3168.54 575.72,3168.54 620.08,3212.9 620.08,3260.28 644.88,3285.08 798.43,3285.08 832.48,3251.02 832.48,3189.41 ; 561.81,3763.54 565.4,3767.13 565.4,3770.1 ; 561.81,4063.54 575.72,4063.54 620.08,4107.9 620.08,4155.28 644.88,4180.08 798.43,4180.08 832.48,4146.02 832.48,4084.41 ; 561.81,4653.54 565.4,4657.13 565.4,4660.1 ; 561.81,4953.54 575.72,4953.54 620.08,4997.9 620.08,5045.28 644.88,5070.08 798.43,5070.08 832.48,5036.02 832.48,4974.41 ; 561.81,5543.54 565.4,5547.13 565.4,5550.1 ; 561.81,5843.54 575.72,5843.54 620.08,5887.9 620.08,5935.28 644.88,5960.08 798.43,5960.08 832.48,5926.02 832.48,5864.41 ; 561.81,6428.54 565.4,6432.13 565.4,6435.1 ; 561.81,6728.54 575.72,6728.54 620.08,6772.9 620.08,6820.28 644.88,6845.08 798.43,6845.08 832.48,6811.02 832.48,6749.41 ; 805.51,1299.45 805.51,1345.91 832.68,1373.07 832.68,1414.21 832.48,1414.41 ; 805.51,2189.45 805.51,2235.91 832.68,2263.07 832.68,2304.21 832.48,2304.41 ; 805.51,3074.45 805.51,3120.91 832.68,3148.07 832.68,3189.21 832.48,3189.41 ; 805.51,3969.45 805.51,4015.91 832.68,4043.07 832.68,4084.21 832.48,4084.41 ; 805.51,4859.45 805.51,4905.91 832.68,4933.07 832.68,4974.21 832.48,4974.41 ; 805.51,5749.45 805.51,5795.91 832.68,5823.07 832.68,5864.21 832.48,5864.41 ; 805.51,6634.45 805.51,6680.91 832.68,6708.07 832.68,6749.21 832.48,6749.41 ; 852.76,1414.41 832.48,1414.41 ; 852.76,2304.41 832.48,2304.41 ; 852.76,3189.41 832.48,3189.41 ; 852.76,4084.41 832.48,4084.41 ; 852.76,4974.41 832.48,4974.41 ; 852.76,5864.41 832.48,5864.41 ; 852.76,6749.41 832.48,6749.41 ; 853.94,1415.59 872.44,1434.09 930.71,1434.09 ; 853.94,2305.59 872.44,2324.09 930.71,2324.09 ; 853.94,3190.59 872.44,3209.09 930.71,3209.09 ; 853.94,4085.59 872.44,4104.09 930.71,4104.09 ; 853.94,4975.59 872.44,4994.09 930.71,4994.09 ; 853.94,5865.59 872.44,5884.09 930.71,5884.09 ; 853.94,6750.59 872.44,6769.09 930.71,6769.09 ; 1192.91,949.06 1190.76,949.27 1190.63,949.27 1161.32,978.58 1087.4,978.58 1045.28,1020.71 1044.88,1020.71 1044.88,1085.28 1144.09,1184.49 1151.97,1184.49 1152.76,1185.28 1357.09,1185.28 ; 1192.91,1839.06 1190.76,1839.27 1190.63,1839.27 1161.32,1868.58 1087.4,1868.58 1045.28,1910.71 1044.88,1910.71 1044.88,1975.28 1144.09,2074.49 1151.97,2074.49 1152.76,2075.28 1357.09,2075.28 ; 1192.91,2724.06 1190.76,2724.27 1190.63,2724.27 1161.32,2753.58 1087.4,2753.58 1045.28,2795.71 1044.88,2795.71 1044.88,2860.28 1144.09,2959.49 1151.97,2959.49 1152.76,2960.28 1357.09,2960.28 ; 1192.91,3619.06 1190.76,3619.27 1190.63,3619.27 1161.32,3648.58 1087.4,3648.58 1045.28,3690.71 1044.88,3690.71 1044.88,3755.28 1144.09,3854.49 1151.97,3854.49 1152.76,3855.28 1357.09,3855.28 ; 1192.91,4509.06 1190.76,4509.27 1190.63,4509.27 1161.32,4538.58 1087.4,4538.58 1045.28,4580.71 1044.88,4580.71 1044.88,4645.28 1144.09,4744.49 1151.97,4744.49 1152.76,4745.28 1357.09,4745.28 ; 1192.91,5399.06 1190.76,5399.27 1190.63,5399.27 1161.32,5428.58 1087.4,5428.58 1045.28,5470.71 1044.88,5470.71 1044.88,5535.28 1144.09,5634.49 1151.97,5634.49 1152.76,5635.28 1357.09,5635.28 ; 1192.91,6284.06 1190.76,6284.27 1190.63,6284.27 1161.32,6313.58 1087.4,6313.58 1045.28,6355.71 1044.88,6355.71 1044.88,6420.28 1144.09,6519.49 1151.97,6519.49 1152.76,6520.28 1357.09,6520.28
  Bottom w13.78: 1357.09,1216.77 1609.45,1216.77 1633.46,1240.79 1633.86,1241.18 1633.86,1248.27 ; 1357.09,1248.27 1534.25,1248.27 1551.18,1265.2 1580.71,1294.72 1668.9,1294.72 1704.72,1258.9 1704.72,1248.27 ; 1357.09,2106.77 1609.45,2106.77 1633.46,2130.79 1633.86,2131.18 1633.86,2138.27 ; 1357.09,2138.27 1534.25,2138.27 1551.18,2155.2 1580.71,2184.72 1668.9,2184.72 1704.72,2148.9 1704.72,2138.27 ; 1357.09,2991.77 1609.45,2991.77 1633.46,3015.79 1633.86,3016.18 1633.86,3023.27 ; 1357.09,3023.27 1534.25,3023.27 1551.18,3040.2 1580.71,3069.72 1668.9,3069.72 1704.72,3033.9 1704.72,3023.27 ; 1357.09,3886.77 1609.45,3886.77 1633.46,3910.79 1633.86,3911.18 1633.86,3918.27 ; 1357.09,3918.27 1534.25,3918.27 1551.18,3935.2 1580.71,3964.72 1668.9,3964.72 1704.72,3928.9 1704.72,3918.27 ; 1357.09,4776.77 1609.45,4776.77 1633.46,4800.79 1633.86,4801.18 1633.86,4808.27 ; 1357.09,4808.27 1534.25,4808.27 1551.18,4825.2 1580.71,4854.72 1668.9,4854.72 1704.72,4818.9 1704.72,4808.27 ; 1357.09,5666.77 1609.45,5666.77 1633.46,5690.79 1633.86,5691.18 1633.86,5698.27 ; 1357.09,5698.27 1534.25,5698.27 1551.18,5715.2 1580.71,5744.72 1668.9,5744.72 1704.72,5708.9 1704.72,5698.27 ; 1357.09,6551.77 1609.45,6551.77 1633.46,6575.79 1633.86,6576.18 1633.86,6583.27 ; 1357.09,6583.27 1534.25,6583.27 1551.18,6600.2 1580.71,6629.72 1668.9,6629.72 1704.72,6593.9 1704.72,6583.27 ; v1(1397.64,1185.28) 1424.02,1185.28 1430.32,1191.57 ; v1(1397.64,2075.28) 1424.02,2075.28 1430.32,2081.57 ; v1(1397.64,2960.28) 1424.02,2960.28 1430.32,2966.57 ; v1(1397.64,3855.28) 1424.02,3855.28 1430.32,3861.57 ; v1(1397.64,4745.28) 1424.02,4745.28 1430.32,4751.57 ; v1(1397.64,5635.28) 1424.02,5635.28 1430.32,5641.57 ; v1(1397.64,6520.28) 1424.02,6520.28 1430.32,6526.57
  Bottom w15.75: 1011.02,1083.7 1075.2,1147.87 ; 1011.02,1973.7 1075.2,2037.87 ; 1011.02,2858.7 1075.2,2922.87 ; 1011.02,3753.7 1075.2,3817.87 ; 1011.02,4643.7 1075.2,4707.87 ; 1011.02,5533.7 1075.2,5597.87 ; 1011.02,6418.7 1075.2,6482.87 ; 1357.09,1122.28 1370.87,1122.28 1389.37,1140.79 1376.38,1153.78 ; 1357.09,2012.28 1370.87,2012.28 1389.37,2030.79 1376.38,2043.78 ; 1357.09,2897.28 1370.87,2897.28 1389.37,2915.79 1376.38,2928.78 ; 1357.09,3792.28 1370.87,3792.28 1389.37,3810.79 1376.38,3823.78 ; 1357.09,4682.28 1370.87,4682.28 1389.37,4700.79 1376.38,4713.78 ; 1357.09,5572.28 1370.87,5572.28 1389.37,5590.79 1376.38,5603.78 ; 1357.09,6457.28 1370.87,6457.28 1389.37,6475.79 1376.38,6488.78
  Bottom w19.68: 1389.37,1140.79 1391.14,1142.56 1412.8,1142.56 1430.31,1160.08 1692.05,1160.08 1718.9,1146.07 1719.21,1145.91 ; 1389.37,2030.79 1391.14,2032.56 1412.8,2032.56 1430.31,2050.08 1692.05,2050.08 1718.9,2036.07 1719.21,2035.91 ; 1389.37,2915.79 1391.14,2917.56 1412.8,2917.56 1430.31,2935.08 1692.05,2935.08 1718.9,2921.07 1719.21,2920.91 ; 1389.37,3810.79 1391.14,3812.56 1412.8,3812.56 1430.31,3830.08 1692.05,3830.08 1718.9,3816.07 1719.21,3815.91 ; 1389.37,4700.79 1391.14,4702.56 1412.8,4702.56 1430.31,4720.08 1692.05,4720.08 1718.9,4706.07 1719.21,4705.91 ; 1389.37,5590.79 1391.14,5592.56 1412.8,5592.56 1430.31,5610.08 1692.05,5610.08 1718.9,5596.07 1719.21,5595.91 ; 1389.37,6475.79 1391.14,6477.56 1412.8,6477.56 1430.31,6495.08 1692.05,6495.08 1718.9,6481.07 1719.21,6480.91 ; 1516.93,1046.08 1522.66,1046.08 1527.17,1041.57 1566.54,1041.57 ; 1516.93,1936.08 1522.66,1936.08 1527.17,1931.57 1566.54,1931.57 ; 1516.93,2821.08 1522.66,2821.08 1527.17,2816.57 1566.54,2816.57 ; 1516.93,3716.08 1522.66,3716.08 1527.17,3711.57 1566.54,3711.57 ; 1516.93,4606.08 1522.66,4606.08 1527.17,4601.57 1566.54,4601.57 ; 1516.93,5496.08 1522.66,5496.08 1527.17,5491.57 1566.54,5491.57 ; 1516.93,6381.08 1522.66,6381.08 1527.17,6376.57 1566.54,6376.57 ; 1566.54,983.31 1566.54,1041.57 ; 1566.54,1873.31 1566.54,1931.57 ; 1566.54,2758.31 1566.54,2816.57 ; 1566.54,3653.31 1566.54,3711.57 ; 1566.54,4543.31 1566.54,4601.57 ; 1566.54,5433.31 1566.54,5491.57 ; 1566.54,6318.31 1566.54,6376.57 ; 1570.87,1041.57 1566.54,1041.57 ; 1570.87,1931.57 1566.54,1931.57 ; 1570.87,2816.57 1566.54,2816.57 ; 1570.87,3711.57 1566.54,3711.57 ; 1570.87,4601.57 1566.54,4601.57 ; 1570.87,5491.57 1566.54,5491.57 ; 1570.87,6376.57 1566.54,6376.57
  Bottom w23.62: 246.85,1393.54 277.95,1362.44 279.92,1362.44 298.82,1343.54 511.81,1343.54 561.81,1393.54 ; 246.85,2283.54 277.95,2252.44 279.92,2252.44 298.82,2233.54 511.81,2233.54 561.81,2283.54 ; 246.85,3168.54 277.95,3137.44 279.92,3137.44 298.82,3118.54 511.81,3118.54 561.81,3168.54 ; 246.85,4063.54 277.95,4032.44 279.92,4032.44 298.82,4013.54 511.81,4013.54 561.81,4063.54 ; 246.85,4953.54 277.95,4922.44 279.92,4922.44 298.82,4903.54 511.81,4903.54 561.81,4953.54 ; 246.85,5843.54 277.95,5812.44 279.92,5812.44 298.82,5793.54 511.81,5793.54 561.81,5843.54 ; 246.85,6728.54 277.95,6697.44 279.92,6697.44 298.82,6678.54 511.81,6678.54 561.81,6728.54 ; 1357.09,1185.28 v1(1397.64,1185.28) ; 1357.09,2075.28 v1(1397.64,2075.28) ; 1357.09,2960.28 v1(1397.64,2960.28) ; 1357.09,3855.28 v1(1397.64,3855.28) ; 1357.09,4745.28 v1(1397.64,4745.28) ; 1357.09,5635.28 v1(1397.64,5635.28) ; 1357.09,6520.28 v1(1397.64,6520.28) ; 1489.76,1281.34 1516.14,1281.34 v1(1519.69,1277.8) ; 1489.76,2171.34 1516.14,2171.34 v1(1519.69,2167.8) ; 1489.76,3056.34 1516.14,3056.34 v1(1519.69,3052.8) ; 1489.76,3951.34 1516.14,3951.34 v1(1519.69,3947.8) ; 1489.76,4841.34 1516.14,4841.34 v1(1519.69,4837.8) ; 1489.76,5731.34 1516.14,5731.34 v1(1519.69,5727.8) ; 1489.76,6616.34 1516.14,6616.34 v1(1519.69,6612.8)
  Bottom w27.56: 1674.02,1117.18 1688.98,1132.52 1712.99,1132.52 ; 1674.02,2007.18 1688.98,2022.52 1712.99,2022.52 ; 1674.02,2892.18 1688.98,2907.52 1712.99,2907.52 ; 1674.02,3787.18 1688.98,3802.52 1712.99,3802.52 ; 1674.02,4677.18 1688.98,4692.52 1712.99,4692.52 ; 1674.02,5567.18 1688.98,5582.52 1712.99,5582.52 ; 1674.02,6452.18 1688.98,6467.52 1712.99,6467.52
  Bottom w31.5: v2(1348.03,1056.54) 1400.29,1055.86 1455.51,1111.08 1516.93,1111.08 1565.57,1111.08 1570.87,1116.38 ; v2(1348.03,1946.54) 1400.29,1945.86 1455.51,2001.08 1516.93,2001.08 1565.57,2001.08 1570.87,2006.38 ; v2(1348.03,2831.54) 1400.29,2830.86 1455.51,2886.08 1516.93,2886.08 1565.57,2886.08 1570.87,2891.38 ; v2(1348.03,3726.54) 1400.29,3725.86 1455.51,3781.08 1516.93,3781.08 1565.57,3781.08 1570.87,3786.38 ; v2(1348.03,4616.54) 1400.29,4615.86 1455.51,4671.08 1516.93,4671.08 1565.57,4671.08 1570.87,4676.38 ; v2(1348.03,5506.54) 1400.29,5505.86 1455.51,5561.08 1516.93,5561.08 1565.57,5561.08 1570.87,5566.38 ; v2(1348.03,6391.54) 1400.29,6390.86 1455.51,6446.08 1516.93,6446.08 1565.57,6446.08 1570.87,6451.38 ; 1712.99,1132.52 1718.82,1132.52 1718.9,1135.19 ; 1712.99,2022.52 1718.82,2022.52 1718.9,2025.19 ; 1712.99,2907.52 1718.82,2907.52 1718.9,2910.19 ; 1712.99,3802.52 1718.82,3802.52 1718.9,3805.19 ; 1712.99,4692.52 1718.82,4692.52 1718.9,4695.19 ; 1712.99,5582.52 1718.82,5582.52 1718.9,5585.19 ; 1712.99,6467.52 1718.82,6467.52 1718.9,6470.19 ; 1788.98,1231.34 1718.9,1161.26 1718.9,1146.07 1718.9,1145.91 1718.9,1135.19 ; 1788.98,2121.34 1718.9,2051.26 1718.9,2036.07 1718.9,2035.91 1718.9,2025.19 ; 1788.98,3006.34 1718.9,2936.26 1718.9,2921.07 1718.9,2920.91 1718.9,2910.19 ; 1788.98,3901.34 1718.9,3831.26 1718.9,3816.07 1718.9,3815.91 1718.9,3805.19 ; 1788.98,4791.34 1718.9,4721.26 1718.9,4706.07 1718.9,4705.91 1718.9,4695.19 ; 1788.98,5681.34 1718.9,5611.26 1718.9,5596.07 1718.9,5595.91 1718.9,5585.19 ; 1788.98,6566.34 1718.9,6496.26 1718.9,6481.07 1718.9,6480.91 1718.9,6470.19 ; 1718.9,1135.19 1718.9,1133.23 1719.21,1145.91 1718.9,1135.19 ; 1718.9,2025.19 1718.9,2023.23 1719.21,2035.91 1718.9,2025.19 ; 1718.9,2910.19 1718.9,2908.23 1719.21,2920.91 1718.9,2910.19 ; 1718.9,3805.19 1718.9,3803.23 1719.21,3815.91 1718.9,3805.19 ; 1718.9,4695.19 1719.21,4705.91 1718.9,4693.23 1718.9,4695.19 ; 1718.9,5585.19 1719.21,5595.91 1718.9,5583.23 1718.9,5585.19 ; 1718.9,6470.19 1719.21,6480.91 1718.9,6468.23 1718.9,6470.19
  Bottom w39.37: 1633.86,1342.76 1629.14,1344.78 1628.99,1344.93 1628.99,1398.12 1648.43,1417.56 1744.09,1417.56 1788.98,1372.68 1788.98,1317.95 ; 1633.86,2232.76 1629.14,2234.78 1628.99,2234.93 1628.99,2288.12 1648.43,2307.56 1744.09,2307.56 1788.98,2262.68 1788.98,2207.95 ; 1633.86,3117.76 1629.14,3119.78 1628.99,3119.93 1628.99,3173.12 1648.43,3192.56 1744.09,3192.56 1788.98,3147.68 1788.98,3092.95 ; 1633.86,4012.76 1629.14,4014.78 1628.99,4014.93 1628.99,4068.12 1648.43,4087.56 1744.09,4087.56 1788.98,4042.68 1788.98,3987.95 ; 1633.86,4902.76 1629.14,4904.78 1628.99,4904.93 1628.99,4958.12 1648.43,4977.56 1744.09,4977.56 1788.98,4932.68 1788.98,4877.95 ; 1633.86,5792.76 1629.14,5794.78 1628.99,5794.93 1628.99,5848.12 1648.43,5867.56 1744.09,5867.56 1788.98,5822.68 1788.98,5767.95 ; 1633.86,6677.76 1629.14,6679.78 1628.99,6679.93 1628.99,6733.12 1648.43,6752.56 1744.09,6752.56 1788.98,6707.68 1788.98,6652.95